# EAGLE board PCB_2D_Proiect (EAGLE 9.7.0)
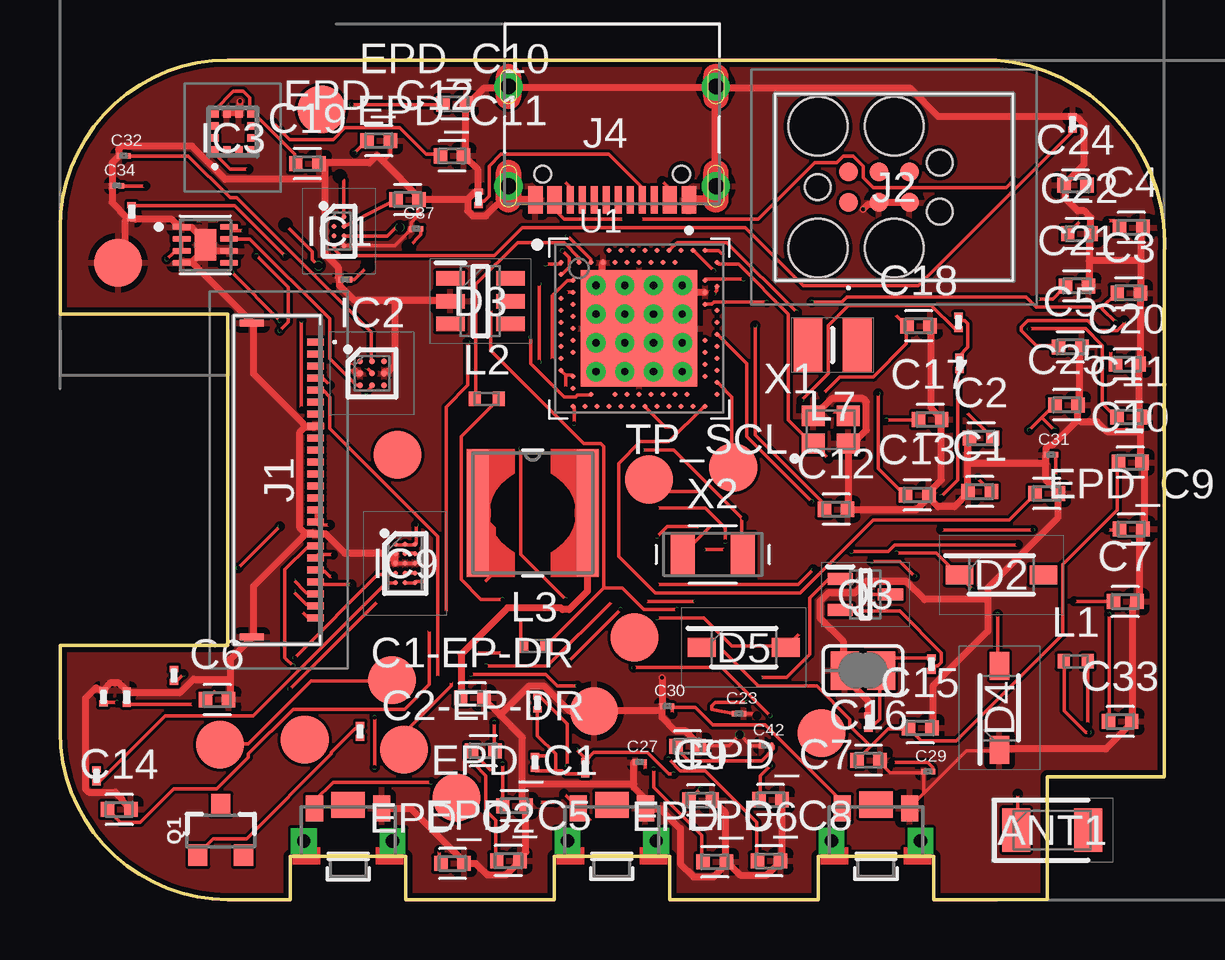
[diagram p0: board, top side]
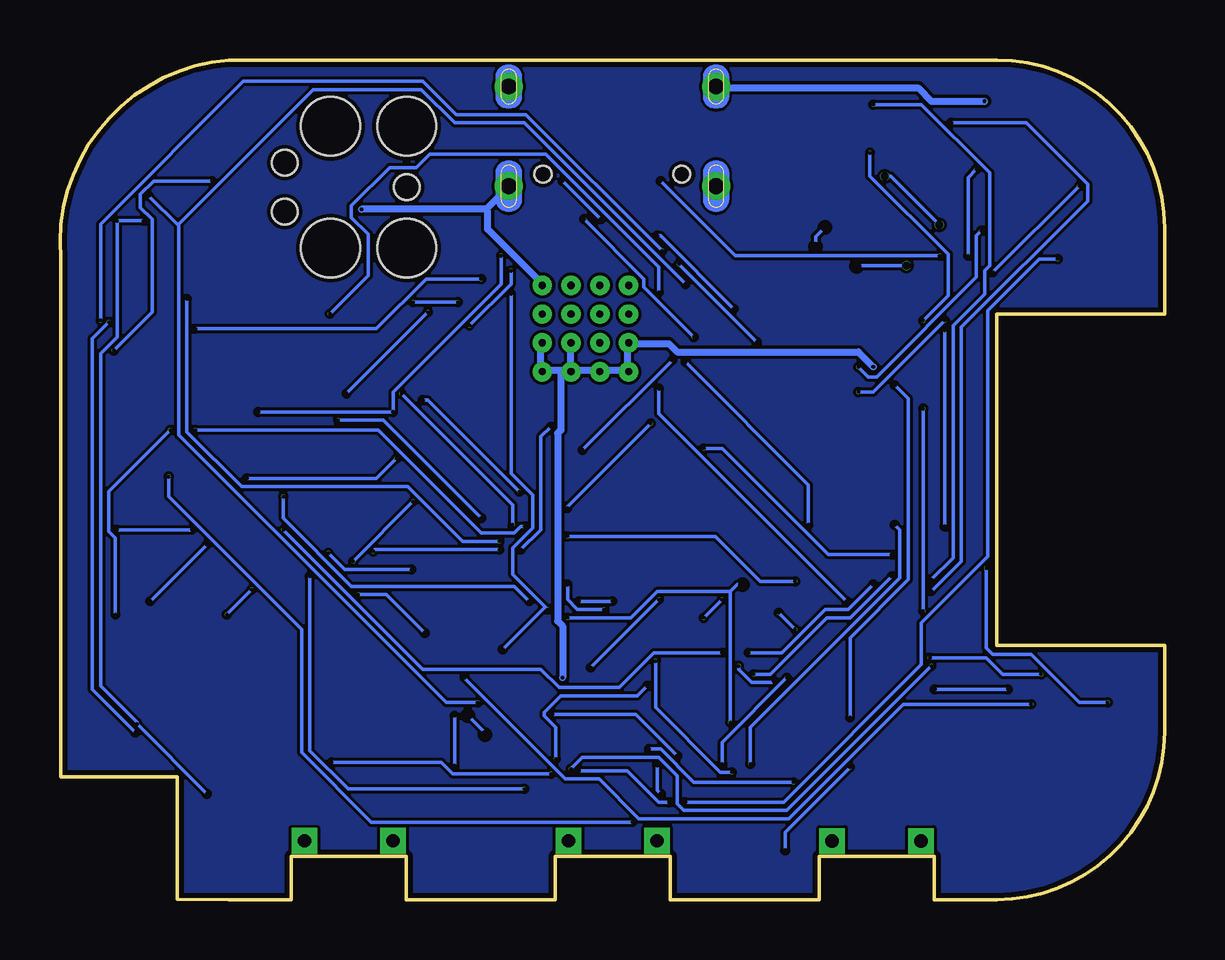
[diagram p1: board, bottom side, seen from below]

Size 46.03 x 35 mm. Coordinates in mm from the lower left corner, seen from the top.
Outline: 39,0 36.4,0 36.4,1.8 31.6,1.8 31.6,0 25.4,0 25.4,1.8 20.6,1.8 20.6,0 14.4,0 14.4,1.8 9.6,1.8 9.6,0 7,0 arc-90 0,7 0,10.6 7,10.6 7,24.4 0,24.4 0,28 arc-90 7,35 39,35 arc-90 46,26.73 46,5.11 41.14,5.11 41.14,0.01 39,0
Copper layers (1*16): Top 0.035mm / dielectric 1.6mm / Bottom 0.035mm
Design rules "jlcpcb-2layers.dru *": minimum track width 0.14998125mm, minimum drill 0.15mm, track to track 5mil, track to pad 5mil, pad to pad 5mil, via to via 5mil, smd to smd 5mil, copper to edge 0.2mm, drill to drill 6mil, minimum pad ring 10mil, minimum via ring 0.003809375mm, stop-mask expansion 4mil, vias tented up to drill 0mil, thermal gap 10mil
Net classes: 1 Power: width 0.3 mm

## Footprints (pad centres in the part's own frame; a part is rotated, then mirrored left to right if it is on the bottom)
2450AT18B100E_ANTC3216X140N = smd 1.15 x 1.8: 1 -1.5,0; 2 1.5,0
CAPC1005X60 = smd 0.56 x 0.629: 1 -0.485,0; 2 0.485,0
GRM011R60J152KE01L_2_CAPC0201X13N = smd 0.22 x 0.23: 1 -0.185,0; 2 0.185,0
ESP32_C6_LIBRARY_5_SOD3716X135N = smd 1.15 x 0.8: 1 -1.75,0; 2 1.75,0
ESP32_C6_LIBRARY_3_SOT95P280X145-6N = smd 1.2 x 0.6: 1 -1.25,0.95; 2 -1.25,0; 3 -1.25,-0.95; 4 1.25,-0.95; 5 1.25,0; 6 1.25,0.95
BQ25180YBGR_BGA8C40P2X4_100X155X50 = smd 0.2 x 0.2: A1 -0.2,0.6; A2 0.2,0.6; B1 -0.2,0.2; B2 0.2,0.2; C1 -0.2,-0.2; C2 0.2,-0.2; D1 -0.2,-0.6; D2 0.2,-0.6
DRV2605YZFR_BGA9C50P3X3_144X144X62 = smd 0.25 x 0.25: A1 -0.5,0.5; A2 0,0.5; A3 0.5,0.5; B1 -0.5,0; B2 0,0; B3 0.5,0; C1 -0.5,-0.5; C2 0,-0.5; C3 0.5,-0.5
BMA423_BMA423 = smd 0.3 x 0.35: 1 -0.75,-0.775; 2 -0.25,-0.775; 3 0.25,-0.775; 4 0.75,-0.775; 7 0.75,0.775; 8 0.25,0.775; 9 -0.25,0.775; 10 -0.75,0.775 | smd 0.35 x 0.3: 5 0.775,-0.25; 6 0.775,0.25; 11 -0.775,0.25; 12 -0.775,-0.25
RT6160AWSC_BGA15C40P3X5_140X230X60 = smd 0.216 x 0.216: A1 -0.4,0.8; A2 0,0.8; A3 0.4,0.8; B1 -0.4,0.4; B2 0,0.4; B3 0.4,0.4; C1 -0.4,0; C2 0,0; C3 0.4,0; D1 -0.4,-0.4; D2 0,-0.4; D3 0.4,-0.4; E1 -0.4,-0.8; E2 0,-0.8; E3 0.4,-0.8
503480-2400_5034802400 = smd 0.3 x 0.7: 1 -5.75,1.525; 2 -5.25,1.525; 3 -4.75,1.525; 4 -4.25,1.525; 5 -3.75,1.525; 6 -3.25,1.525; 7 -2.75,1.525; 8 -2.25,1.525; 9 -1.75,1.525; 10 -1.25,1.525; 11 -0.75,1.525; 12 -0.25,1.525; 13 0.25,1.525; 14 0.75,1.525; 15 1.25,1.525; 16 1.75,1.525; 17 2.25,1.525; 18 2.75,1.525; 19 3.25,1.525; 20 3.75,1.525; 21 4.25,1.525; 22 4.75,1.525; 23 5.25,1.525; 24 5.75,1.525 | smd 0.3 x 1: MP1 -6.54,-1.125; MP2 6.54,-1.125
TC2030-IDC_TC2030IDC = smd 0.783 x 0.783: 1 -0.953,-0.635; 2 -0.953,0.635; 3 0.317,-0.635; 4 0.317,0.635; 5 1.588,-0.635; 6 1.588,0.635 | hole 2.451: -2.223,-2.54; -2.223,2.54; 0.952,-2.54; 0.952,2.54 | hole 1.067: -2.223,0; 2.857,-1.016; 2.857,1.016
KH-TYPE-C-16P_KINGHELM_KH-TYPE-C-16P = smd 0.6 x 1.15: A1_B12 -3.2,4.725; A4_B9 -2.4,4.725; A9_B4 2.4,4.725; A12_B1 3.2,4.725 | smd 0.3 x 1.15: A5 -1.25,4.725; A6 -0.25,4.725; A7 0.25,4.725; A8 1.25,4.725; B5 1.75,4.725; B6 0.75,4.725; B7 -0.75,4.725; B8 -1.75,4.725 | drill 0.65 pad 1.05: SH1 -4.32,0; SH2 4.32,0; SH3 -4.32,4.15; SH4 4.32,4.15 | hole 0.7: -2.89,3.65; 2.89,3.65
NORDIC_NRF_2_RESC0402_L = smd 0.5 x 0.6: 1 -0.5,0; 2 0.5,0
ESP32_C6_LIBRARY_2_IND_4828-WE-TPC_WRE = smd 0.9 x 5.3: 1 -2.286,0; 2 2.286,0
MLP2016SR47MT0S1_INDC2016X100N = smd 1.2 x 2.2: 1 -1.028,0; 2 1.028,0
ESP32_C6_LIBRARY_4_ESP32_C6_LIBRARY_4_ESP32_C6_LIBRARY_4_ESP32_C6_LIBRARY_4_ESP32_WROVER_SPARKFUN-DISCRETESEMI_SOT23-3 = smd 0.8 x 0.9: 1 -0.95,-1; 2 0.95,-1; 3 0,1.1
ESP32_C6_LIBRARY_6_SOT65P210X110-3N = smd 1.05 x 0.5: 1 -1.05,0.65; 2 -1.05,-0.65; 3 1.05,0
CPF0201D7K68C1_0201 = smd 0.35 x 0.25: 1 0,0.275; 2 0,-0.275
ESP32_C6_LIBRARY_7_JUMPER_SJ = smd 1.168 x 1.6: 1 -0.762,0; 2 0.762,0
2025-10-22_07-23-44_LIBRARY_SW_EVP-AKE31A_PAN = smd 0.711 x 1.092: 1 -1.4,-0.972; 2 1.4,-0.972 | drill 0.559 pad 0.914 square: 3 -1.848,0.381; 4 1.848,0.381 | smd 1.397 x 1.092: 5 0,-1.124
HECTOR_WATCH_1_TP20R = smd 2 x 2: TP 0,0
NORDIC_NRF_4_AQFN50P700X700X85_HS-74N = smd 4.85 x 4.85: P$74 0,0 | drill 0.3 pad 0.6: P$75 -1.8,1.8; P$76 -0.6,1.8; P$77 0.6,1.8; P$78 1.8,1.8; P$79 -1.8,0.6; P$80 -0.6,0.6; P$81 0.6,0.6; P$82 1.8,0.6; P$83 -1.8,-0.6; P$84 -0.6,-0.6; P$85 0.6,-0.6; P$86 1.8,-0.6; P$87 -1.8,-1.8; P$88 -0.6,-1.8; P$89 0.6,-1.8; P$90 1.8,-1.8 | smd 0.2 x 0.2: P$A8 -1.25,3.25; P$A10 -0.75,3.25; P$A12 -0.25,3.25; P$A14 0.25,3.25; P$A16 0.75,3.25; P$A18 1.25,3.25; P$A20 1.75,3.25; P$A22 2.25,3.25; P$A23 2.75,3.25; P$AA24 3.25,-2.25; P$AB2 -2.75,-2.5; P$AC5 -2,-2.75; P$AC9 -1,-2.75; P$AC11 -0.5,-2.75; P$AC13 0,-2.75; P$AC15 0.5,-2.75; P$AC17 1,-2.75; P$AC19 1.5,-2.75; P$AC21 2,-2.75; P$AC24 3.25,-2.75; P$AD2 -2.75,-3.25; P$AD4 -2.25,-3.25; P$AD6 -1.75,-3.25; P$AD8 -1.25,-3.25; P$AD10 -0.75,-3.25; P$AD12 -0.25,-3.25; P$AD14 0.25,-3.25; P$AD16 0.75,-3.25; P$AD18 1.25,-3.25; P$AD20 1.75,-3.25; P$AD22 2.25,-3.25; P$AD23 2.75,-3.25; P$B1 -3.25,2.75; P$B3 -2.5,2.75; P$B5 -2,2.75; P$B7 -1.5,2.75; P$B9 -1,2.75; P$B11 -0.5,2.75; P$B13 0,2.75; P$B15 0.5,2.75; P$B17 1,2.75; P$B19 1.5,2.75; P$B24 3.25,2.75; P$C1 -3.25,2.25; P$D2 -2.75,2; P$D23 2.75,2; P$E24 3.25,1.75; P$F2 -2.75,1.5; P$F23 2.75,1.5; P$G1 -3.25,1.25; P$H2 -2.75,1; P$H23 2.75,1; P$J1 -3.25,0.75; P$J24 3.25,0.75; P$K2 -2.75,0.5; P$L1 -3.25,0.25; P$L24 3.25,0.25; P$M2 -2.75,0; P$N1 -3.25,-0.25; P$N24 3.25,-0.25; P$P2 -2.75,-0.5; P$P23 2.75,-0.5; P$R1 -3.25,-0.75; P$R24 3.25,-0.75; P$T2 -2.75,-1; P$T23 2.75,-1; P$U1 -3.25,-1.25; P$U24 3.25,-1.25; P$V23 2.75,-1.5; P$W1 -3.25,-1.75; P$W24 3.25,-1.75; P$Y2 -2.75,-2; P$Y23 2.75,-2
ESP32_C6_LIBRARY_SON50P200X200X80-9N = smd 0.76 x 0.27: 1 -0.985,0.75; 2 -0.985,0.25; 3 -0.985,-0.25; 4 -0.985,-0.75; 5 0.985,-0.75; 6 0.985,-0.25; 7 0.985,0.25; 8 0.985,0.75 | smd 0.9 x 1.3: 9 0,0
NORDIC_NRF_BT-XTAL_2016_N = smd 0.95 x 0.85: 1 -0.725,-0.575; 2 0.725,-0.575; 3 0.725,0.575; 4 -0.725,0.575
XTAL330X1051X90N = smd 1 x 1.8: 1 -1.25,0; 2 1.25,0

## Placement (x,y rotation side)
ANT1  2450AT18B100E_2450AT18B100E  [2450AT18B100E_ANTC3216X140N]  41.34,2.89 0 top
C1  12pF  [CAPC1005X60]  38.32,17.01 0 top
C1-EP-DR  10uF  [CAPC1005X60]  17.18,8.4 0 top
C2  12pF  [CAPC1005X60]  38.38,19.24 0 top
C2-EP-DR  4.7uF/25V  [CAPC1005X60]  17.63,6.2 0 top
C3  1pF  [CAPC1005X60]  44.54,25.29 0 top
C4  1pF  [CAPC1005X60]  44.64,28.02 0 top
C5  100nF  [CAPC1005X60]  42.1,23.03 0 top
C6  4.7µF  [CAPC1005X60]  6.54,8.33 0 top
C7  100nF  [CAPC1005X60]  44.39,12.42 0 top
C8  100nF  [CAPC1005X60]  41.11,16.93 0 top
C9  820pF  [CAPC1005X60]  26.69,4.14 0 top
C10  100pF  [CAPC1005X60]  44.59,18.23 0 top
C11  100pF  [CAPC1005X60]  44.53,20.12 0 top
C12  100nF  [CAPC1005X60]  32.34,16.27 0 top
C13  100nF  [CAPC1005X60]  35.72,16.87 0 top
C14  4.7µF  [CAPC1005X60]  2.47,3.75 0 top
C15  1.0µF  [CAPC1005X60]  35.84,7.15 0 top
C16  47nF  [CAPC1005X60]  33.69,5.81 0 top
C17  12pF  [CAPC1005X60]  36.25,20.01 0 top
C18  12pF  [CAPC1005X60]  35.77,23.91 0 top
C19  100uF  [CAPC1005X60]  10.31,30.68 0 top
C20  4.7µF  [CAPC1005X60]  44.47,22.32 0 top
C21  4.7µF  [CAPC1005X60]  42.37,25.58 0 top
C22  1pF  [CAPC1005X60]  42.48,27.76 0 top
C23  GRM011R60J152KE01L_2_GRM011R60J152KE01L  [GRM011R60J152KE01L_2_CAPC0201X13N]  28.29,7.75 0 top
C24  10uF  [CAPC1005X60]  42.31,29.78 0 top
C25  22uF  [CAPC1005X60]  41.94,20.62 0 top
C27  GRM011R60J152KE01L_2_GRM011R60J152KE01L  [GRM011R60J152KE01L_2_CAPC0201X13N]  24.16,5.73 0 top
C29  GRM011R60J152KE01L_2_GRM011R60J152KE01L  [GRM011R60J152KE01L_2_CAPC0201X13N]  36.17,5.33 0 top
C30  GRM011R60J152KE01L_2_GRM011R60J152KE01L  [GRM011R60J152KE01L_2_CAPC0201X13N]  25.3,8.06 0 top
C31  GRM011R60J152KE01L_2_GRM011R60J152KE01L  [GRM011R60J152KE01L_2_CAPC0201X13N]  41.29,18.53 0 top
C32  GRM011R60J152KE01L_2_GRM011R60J152KE01L  [GRM011R60J152KE01L_2_CAPC0201X13N]  2.66,31 0 top
C33  22uF  [CAPC1005X60]  44.17,7.42 0 top
C34  GRM011R60J152KE01L_2_GRM011R60J152KE01L  [GRM011R60J152KE01L_2_CAPC0201X13N]  2.38,29.76 0 top
C37  GRM011R60J152KE01L_2_GRM011R60J152KE01L  [GRM011R60J152KE01L_2_CAPC0201X13N]  14.84,27.96 0 top
C38  GRM011R60J152KE01L_2_GRM011R60J152KE01L  [GRM011R60J152KE01L_2_CAPC0201X13N]  11.88,25.84 0 top
C39  10uF  [CAPC1005X60]  14.48,29.18 0 top
C42  GRM011R60J152KE01L_2_GRM011R60J152KE01L  [GRM011R60J152KE01L_2_CAPC0201X13N]  29.41,6.42 0 top
C43  4.7uF  [CAPC1005X60]  26.14,6.39 0 top
D2  ESP32_C6_LIBRARY_5_MBR0530  [ESP32_C6_LIBRARY_5_SOD3716X135N]  39.22,13.54 0 top
D3  ESP32_C6_LIBRARY_3_USBLC6-2SC6Y  [ESP32_C6_LIBRARY_3_SOT95P280X145-6N]  17.52,24.94 0 top
D4  ESP32_C6_LIBRARY_5_MBR0530  [ESP32_C6_LIBRARY_5_SOD3716X135N]  39.14,7.99 90 top
D5  ESP32_C6_LIBRARY_5_MBR0530  [ESP32_C6_LIBRARY_5_SOD3716X135N]  28.49,10.51 0 top
EPD_C1  1uF/50V  [CAPC1005X60]  18.93,3.91 0 top
EPD_C2  1uF/50V  [CAPC1005X60]  16.36,1.51 0 top
EPD_C5  0.1uF/50V  [CAPC1005X60]  18.68,1.62 0 top
EPD_C6  1uF/50V  [CAPC1005X60]  27.28,1.57 0 top
EPD_C7  1uF/50V  [CAPC1005X60]  29.6,4.16 0 top
EPD_C8  1uF/50V  [CAPC1005X60]  29.54,1.61 0 top
EPD_C9  1uF/50V  [CAPC1005X60]  44.64,15.44 0 top
EPD_C10  1uF/50V  [CAPC1005X60]  16.44,33.17 0 top
EPD_C11  1uF/50V  [CAPC1005X60]  16.33,31 0 top
EPD_C12  1uF/50V  [CAPC1005X60]  13.28,31.64 0 top
IC1  BQ25180YBGR_BQ25180YBGR  [BQ25180YBGR_BGA8C40P2X4_100X155X50]  11.62,27.86 0 top
IC2  DRV2605YZFR_DRV2605YZFR  [DRV2605YZFR_BGA9C50P3X3_144X144X62]  13,21.94 0 top
IC3  BMA423_BMA423  [BMA423_BMA423]  7.2,32 0 top
IC9  RT6160AWSC_RT6160AWSC  [RT6160AWSC_BGA15C40P3X5_140X230X60]  14.38,14.01 0 top
J1  503480-2400_503480-2400  [503480-2400_5034802400]  9.12,17.49 270 top
J2  TC2030-IDC_TC2030-IDC  [TC2030-IDC_TC2030IDC]  33.8,29.7 0 top
J4  KH-TYPE-C-16P_KH-TYPE-C-16P  [KH-TYPE-C-16P_KINGHELM_KH-TYPE-C-16P]  23.01,33.89 180 top
L1  3.9nH  [NORDIC_NRF_2_RESC0402_L]  42.32,9.93 0 top
L2  10µH  [NORDIC_NRF_2_RESC0402_L]  17.79,20.87 0 top
L3  15nH  [NORDIC_NRF_2_RESC0402_L]  19.77,10.57 0 top
L5  ESP32_C6_LIBRARY_2_744043680IND_4828-WE-TPC_WRE  [ESP32_C6_LIBRARY_2_IND_4828-WE-TPC_WRE]  19.69,16.12 0 top
L7  MLP2016SR47MT0S1_FTC252012SR47MBCA  [MLP2016SR47MT0S1_INDC2016X100N]  32.19,23.12 0 top
Q1  20V/4.2A/52mΩ/1.4W  [ESP32_C6_LIBRARY_4_ESP32_C6_LIBRARY_4_ESP32_C6_LIBRARY_4_ESP32_C6_LIBRARY_4_ESP32_WROVER_SPARKFUN-DISCRETESEMI_SOT23-3]  6.7,2.85 0 top
Q3  ESP32_C6_LIBRARY_6_SI1308EDL-T1-GE3  [ESP32_C6_LIBRARY_6_SOT65P210X110-3N]  33.56,12.72 0 top
R1_EP_DR  CPF0201D7K68C1_CPF0201D7K68C1  [CPF0201D7K68C1_0201]  36.31,9.81 0 top
R1_USB  CPF0201D7K68C1_CPF0201D7K68C1  [CPF0201D7K68C1_0201]  17.44,29.23 0 top
R2  CPF0201D7K68C1_CPF0201D7K68C1  [CPF0201D7K68C1_0201]  1.52,5.16 0 top
R2_EP_DR  CPF0201D7K68C1_CPF0201D7K68C1  [CPF0201D7K68C1_0201]  2.78,8.44 0 top
R2_USB  CPF0201D7K68C1_CPF0201D7K68C1  [CPF0201D7K68C1_0201]  2.99,28.67 0 top
R3  CPF0201D7K68C1_CPF0201D7K68C1  [CPF0201D7K68C1_0201]  1.81,8.45 0 top
R4  CPF0201D7K68C1_CPF0201D7K68C1  [CPF0201D7K68C1_0201]  4.74,9.34 0 top
R5  CPF0201D7K68C1_CPF0201D7K68C1  [CPF0201D7K68C1_0201]  19.79,5.72 0 top
R7  CPF0201D7K68C1_CPF0201D7K68C1  [CPF0201D7K68C1_0201]  21.89,5.5 0 top
R8  CPF0201D7K68C1_CPF0201D7K68C1  [CPF0201D7K68C1_0201]  19.89,8.2 0 top
R9  CPF0201D7K68C1_CPF0201D7K68C1  [CPF0201D7K68C1_0201]  42.19,32.37 0 top
R17  CPF0201D7K68C1_CPF0201D7K68C1  [CPF0201D7K68C1_0201]  37.43,24.07 0 top
R18  CPF0201D7K68C1_CPF0201D7K68C1  [CPF0201D7K68C1_0201]  37.48,22.35 0 top
R_PWR_EPD  CPF0201D7K68C1_CPF0201D7K68C1  [CPF0201D7K68C1_0201]  12.5,7.01 0 top
R_TYPE_SEL  CPF0201D7K68C1_CPF0201D7K68C1  [CPF0201D7K68C1_0201]  33.69,7.4 0 top
SJ1  [ESP32_C6_LIBRARY_7_JUMPER_SJ]  33.46,9.55 0 top
SW_DN  2025-10-22_07-23-44_LIBRARY_EVP-AKE31ASW_EVP-AKE31A_PAN  [2025-10-22_07-23-44_LIBRARY_SW_EVP-AKE31A_PAN]  12,2.83 180 top
SW_ENT  2025-10-22_07-23-44_LIBRARY_EVP-AKE31ASW_EVP-AKE31A_PAN  [2025-10-22_07-23-44_LIBRARY_SW_EVP-AKE31A_PAN]  23,2.83 180 top
SW_UP  2025-10-22_07-23-44_LIBRARY_EVP-AKE31ASW_EVP-AKE31A_PAN  [2025-10-22_07-23-44_LIBRARY_SW_EVP-AKE31A_PAN]  34,2.83 180 top
TP_3.3V  HECTOR_WATCH_1_TPTP20R  [HECTOR_WATCH_1_TP20R]  16.52,4.25 0 top
TP_BAT_GND  HECTOR_WATCH_1_TPTP20R  [HECTOR_WATCH_1_TP20R]  22.25,7.86 0 top
TP_GND  HECTOR_WATCH_1_TPTP20R  [HECTOR_WATCH_1_TP20R]  2.42,26.55 0 top
TP_ON  HECTOR_WATCH_1_TPTP20R  [HECTOR_WATCH_1_TP20R]  31.72,6.95 0 top
TP_OP  HECTOR_WATCH_1_TPTP20R  [HECTOR_WATCH_1_TP20R]  10.9,32.95 0 top
TP_RESET  HECTOR_WATCH_1_TPTP20R  [HECTOR_WATCH_1_TP20R]  14.07,18.54 0 top
TP_SCL  HECTOR_WATCH_1_TPTP20R  [HECTOR_WATCH_1_TP20R]  24.54,17.51 0 top
TP_SDA  HECTOR_WATCH_1_TPTP20R  [HECTOR_WATCH_1_TP20R]  14.34,6.25 0 top
TP_SWDCLK  HECTOR_WATCH_1_TPTP20R  [HECTOR_WATCH_1_TP20R]  28.05,18.01 0 top
TP_SWDIO  HECTOR_WATCH_1_TPTP20R  [HECTOR_WATCH_1_TP20R]  23.93,10.93 0 top
TP_SWO  HECTOR_WATCH_1_TPTP20R  [HECTOR_WATCH_1_TP20R]  6.67,6.45 0 top
TP_VBAT  HECTOR_WATCH_1_TPTP20R  [HECTOR_WATCH_1_TP20R]  10.2,6.67 0 top
TP_VREG  HECTOR_WATCH_1_TPTP20R  [HECTOR_WATCH_1_TP20R]  13.84,9.14 0 top
U1  NORDIC_NRF_4_NRF52840_QF  [NORDIC_NRF_4_AQFN50P700X700X85_HS-74N]  24.13,23.8 0 top
U3  ESP32_C6_LIBRARY_MAX17048G+T10  [ESP32_C6_LIBRARY_SON50P200X200X80-9N]  6.06,27.29 0 top
X1  32MHZ  [NORDIC_NRF_BT-XTAL_2016_N]  32.11,19.58 0 top
X2  FC-135  [XTAL330X1051X90N]  27.2,14.39 0 top

## Library data of the parts
ANT1 = InkTime_v5; ARROW_PART_NUMBER: 2450AT18B100E; ARROW_PRICE-STOCK: https://www.arrow.com/en/products/2450at18b100e/johanson-dielectrics?utm_currency=USD&region=nac; DESCRIPTION: Antennas 2.45GHz ANTENNA; HEIGHT: 1.4mm; MANUFACTURER_NAME: JOHANSON TECHNOLOGY; MANUFACTURER_PART_NUMBER: 2450AT18B100E; MOUSER_PART_NUMBER: 609-2450AT18B100E; MOUSER_PRICE-STOCK: https://www.mouser.co.uk/ProductDetail/Johanson-Technology/2450AT18B100E?qs=yCnrNFeXz%252Bh5MFsFIXGZGA%3D%3D
C1 C1-EP-DR C2 C2-EP-DR C3-C22 C24 C25 C33 C39 C43 EPD_C1 EPD_C2 EPD_C5-EPD_C12 = Tinkercad; CATEGORY: Capacitor
C23 C27 C34 C42 = InkTime_v5; AVAILABILITY: In Stock; CAP: 0.1uF; CHECK_PRICES: https://www.snapeda.com/parts/GRM011R60J152KE01L/Murata/view-part/?ref=eda; DESCRIPTION: SMD Capacitor X5R(EIA) with Capacitance: 1500pF Tol. 10%. Rated Voltage: 6.3Vdc; MF: Murata; MP: GRM011R60J152KE01L; PACKAGE: 0201 Murata; PRICE: None; SNAPEDA_LINK: https://www.snapeda.com/parts/GRM011R60J152KE01L/Murata/view-part/?ref=snap
C29-C32 C37 C38 = InkTime_v5; AVAILABILITY: In Stock; CAP: 1uF; CHECK_PRICES: https://www.snapeda.com/parts/GRM011R60J152KE01L/Murata/view-part/?ref=eda; DESCRIPTION: SMD Capacitor X5R(EIA) with Capacitance: 1500pF Tol. 10%. Rated Voltage: 6.3Vdc; MF: Murata; MP: GRM011R60J152KE01L; PACKAGE: 0201 Murata; PRICE: None; SNAPEDA_LINK: https://www.snapeda.com/parts/GRM011R60J152KE01L/Murata/view-part/?ref=snap
D2 D4 D5 = InkTime_v5; AVAILABILITY: In Stock; CHECK_PRICES: https://www.snapeda.com/parts/MBR0530/Onsemi/view-part/?ref=eda; DESCRIPTION: Diode Schottky 30 V 500mA Surface Mount SOD-123; MF: ON Semiconductor; MP: MBR0530; PACKAGE: SOD-123-2 ON Semiconductor; PRICE: None; PURCHASE-URL: https://www.snapeda.com/api/url_track_click_mouser/?unipart_id=179458&manufacturer=ON Semiconductor&part_name=MBR0530&search_term=None; SHORT_NAME: MBR0530; SNAPEDA_LINK: https://www.snapeda.com/parts/MBR0530/Onsemi/view-part/?ref=snap
D3 = InkTime_v5; AVAILABILITY: In Stock; CHECK_PRICES: https://www.snapeda.com/parts/USBLC6-2SC6Y/STMicroelectronics/view-part/?ref=eda; DESCRIPTION: 17V Clamp 5A (8/20µs) Ipp Tvs Diode Surface Mount SOT-23-6; MF: STMicroelectronics; MP: USBLC6-2SC6Y; PACKAGE: SOT-23-6 STMicroelectronics; PRICE: None; SHORT_NAME: USBLC6-2SC6Y; SNAPEDA_LINK: https://www.snapeda.com/parts/USBLC6-2SC6Y/STMicroelectronics/view-part/?ref=snap
IC1 = InkTime_v5; ARROW_PART_NUMBER: BQ25180YBGR; ARROW_PRICE-STOCK: https://www.arrow.com/en/products/bq25180ybgr/texas-instruments?utm_currency=USD&region=nac; DESCRIPTION: Charger IC Lithium Ion/Polymer, Lithium Iron Phosphate 8-DSBGA (1.6x1.1); HEIGHT: 0.5mm; MANUFACTURER_NAME: Texas Instruments; MANUFACTURER_PART_NUMBER: BQ25180YBGR; MOUSER_PART_NUMBER: 595-BQ25180YBGR; MOUSER_PRICE-STOCK: https://www.mouser.co.uk/ProductDetail/Texas-Instruments/BQ25180YBGR?qs=doiCPypUmgEWjAK%252BJAX6Tw%3D%3D
IC2 = InkTime_v5; ARROW_PART_NUMBER: DRV2605YZFR; ARROW_PRICE-STOCK: https://www.arrow.com/en/products/drv2605yzfr/texas-instruments?region=nac; DESCRIPTION: Haptic Driver for ERM/LRA with Built-In Library and Smart Loop Architecture; HEIGHT: 0.625mm; MANUFACTURER_NAME: Texas Instruments; MANUFACTURER_PART_NUMBER: DRV2605YZFR; SHORT_NAME: DRV2605YZFR
IC3 = InkTime_v5; ARROW_PART_NUMBER: BMA423; ARROW_PRICE-STOCK: https://www.arrow.com/en/products/bma423/bosch; DESCRIPTION: Accelerometers Triaxial low-g 12bit Acceleration Sensor; HEIGHT: 1mm; MANUFACTURER_NAME: BOSCH; MANUFACTURER_PART_NUMBER: BMA423; MOUSER_PART_NUMBER: 262-BMA423; MOUSER_PRICE-STOCK: https://www.mouser.co.uk/ProductDetail/Bosch-Sensortec/BMA423?qs=HXFqYaX1Q2xC%252BSgeGoX3mg%3D%3D
IC9 = InkTime_v5; DESCRIPTION: Buck-Boost Regulator Positive Output Step-Up/Step-Down I2C DC-DC Controller IC 15-WL-CSP (BSC) (1.4x2.3); HEIGHT: 0.6mm; MANUFACTURER_NAME: RICHTEK; MANUFACTURER_PART_NUMBER: RT6160AWSC; MOUSER_PART_NUMBER: 835-RT6160AWSC; MOUSER_PRICE-STOCK: https://www.mouser.co.uk/ProductDetail/Richtek/RT6160AWSC?qs=amGC7iS6iy%2FLd9PSoixZXQ%3D%3D
J1 = InkTime_v5; DESCRIPTION: FFC & FPC Connectors 0.5mm FPC RA SMT Dual Contact 24Ckt; HEIGHT: 1.87mm; MANUFACTURER_NAME: Molex; MANUFACTURER_PART_NUMBER: 503480-2400; MOUSER_PART_NUMBER: 538-503480-2400; MOUSER_PRICE-STOCK: https://www.mouser.co.uk/ProductDetail/Molex/503480-2400?qs=OAhjpuo3Vu7efIoxFh9AOw%3D%3D
J2 = InkTime_v5; DESCRIPTION: CABLE ADAPTER 6 POS; HEIGHT: 19mm; MANUFACTURER_NAME: Tag Connect; MANUFACTURER_PART_NUMBER: TC2030-IDC
J4 = InkTime_v5; AVAILABILITY: Not in stock; CHECK_PRICES: https://www.snapeda.com/parts/KH-TYPE-C-16P/Kinghelm/view-part/?ref=eda; MF: kinghelm; MP: KH-TYPE-C-16P; PACKAGE: None; PRICE: None; SHORT_NAME: KH-TYPE-C-16P; SNAPEDA_LINK: https://www.snapeda.com/parts/KH-TYPE-C-16P/Kinghelm/view-part/?ref=snap
L1-L3 SJ1 TP_3.3V TP_BAT_GND TP_GND TP_ON TP_OP TP_RESET TP_SCL TP_SDA TP_SWDCLK TP_SWDIO TP_SWO TP_VBAT TP_VREG U1 X1 = InkTime_v5
L5 = InkTime_v5; COPYRIGHT: Copyright (C) 2024 Ultra Librarian. All rights reserved.; MANUFACTURER_PART_NUMBER: 744043680; MFR_NAME: Wurth Electronics; VAL: 68uH
L7 = InkTime_v5; DESCRIPTION: SMD / SMT Inductors (Coils), L=0.47?H, L x W x T :; HEIGHT: 1mm; JLCPCB: https://jlcpcb.com/partdetail/6763488-FTC252012SR47MBCA/C5832368; MANUFACTURER_NAME: TDK; MANUFACTURER_PART_NUMBER: FTC252012SR47MBCA; SHORT_NAME: FTC252012SR47MBCA
Q1 = InkTime_v5; PROD_ID: TRAN-14388; SHORT_NAME: DMG2305UX-7
Q3 = InkTime_v5; AVAILABILITY: In Stock; CHECK_PRICES: https://www.snapeda.com/parts/SI1308EDL-T1-GE3/Vishay+Siliconix/view-part/?ref=eda; DESCRIPTION: Si1308EDL-T1-GE3 N-channel MOSFET Transistor, 1.5 A, 30 V, 3-Pin SC-70 | Siliconix / Vishay SI1308EDL-T1-GE3; MF: Vishay Siliconix; MP: SI1308EDL-T1-GE3; PACKAGE: SOT-323 Vishay Semiconductor; PRICE: None; PURCHASE-URL: https://www.snapeda.com/api/url_track_click_mouser/?unipart_id=274603&manufacturer=Vishay Siliconix&part_name=SI1308EDL-T1-GE3&search_term=None; SHORT_NAME: SI1308EDL-T1-GE3; SNAPEDA_LINK: https://www.snapeda.com/parts/SI1308EDL-T1-GE3/Vishay+Siliconix/view-part/?ref=snap
R1_EP_DR = InkTime_v5; VAL: 0.47
R1_USB R2_USB = InkTime_v5; VAL: 5K1
R2-R4 = InkTime_v5; VAL: 0
R2_EP_DR R5 R7-R9 R_PWR_EPD = InkTime_v5; VAL: 10K
R17 R18 = InkTime_v5; VAL: 3K3
R_TYPE_SEL = InkTime_v5; VAL: 2.2
SW_DN SW_ENT SW_UP = InkTime_v5; COPYRIGHT: Copyright (C) 2025 Ultra Librarian. All rights reserved.; DIGI-KEY_PART_NUMBER_1: P123437TR-ND; DIGI-KEY_PART_NUMBER_2: P123437CT-ND; DIGI-KEY_PART_NUMBER_3: P123437DKR-ND; MANUFACTURER_NAME: Panasonic; MANUFACTURER_PART_NUMBER: EVP-AKE31A
U3 = InkTime_v5; AVAILABILITY: In Stock; CHECK_PRICES: https://www.snapeda.com/parts/MAX17048G+T10/Analog+Devices/view-part/?ref=eda; DESCRIPTION: 3µA 1-Cell/2-Cell Fuel Gauge with ModelGauge; MF: Analog Devices; MP: MAX17048G+T10; PACKAGE: TDFN-8 Maxim; PRICE: None; PURCHASE-URL: https://www.snapeda.com/api/url_track_click_mouser/?unipart_id=329239&manufacturer=Analog Devices&part_name=MAX17048G+T10&search_term=None; SHORTNAME: U3; SHORT_NAME: MAX17048G+T10; SNAPEDA_LINK: https://www.snapeda.com/parts/MAX17048G+T10/Analog+Devices/view-part/?ref=snap
X2 = Frequency-Source; CATEGORY: Crystals; DATASHEET: https://download.epsondevice.com/td/pdf/app/FC-135_en.pdf; DESCRIPTION: 32.768 kHz ±20 ppm Crystal 12.5 pF 70 kOhms 2-SMD No Lead; FREQUENCY: 32.768 kHz; FREQUENCY_STABILITY: NA; LOAD_CAPACITANCE: 12.5 pF; MANUFACTURER: EPSON; MPN: FC-135 32.7680KA-A5; OPERATING_TEMPERATURE: -40°C ~ 85°C; PACKAGE_SIZE: 2-SMD No Lead; PACKAGE_TYPE: Surface Mount; PART_STATUS: Active; ROHS: Compliant; SERIES: FC-135; SUBCATEGORY: Oscillators; TOLERANCE: ±20 ppm; TYPE: Resonators

## Nets
3V3/1.7D [Power]: Q1.2
3V3/2.4A [Power]: TP_3.3V.TP
ALERT/1.6C: U3.5
ALERT/2.5C: U1.P$J24
D+/1.5D: D3.4
D+/2.7D: U1.P$AD6
D-/1.5D: D3.6
D-/2.7D: U1.P$AD4
DN: D3.1
DP: D3.3
EPD_3V3 [Power]: C1-EP-DR.1 L5.2
EPD_BUSY/1.5D: J1.9
EPD_BUSY/2.2D: U1.P$AD12
EPD_CS/1.4C: J1.12
EPD_CS/2.2D: U1.P$K2
EPD_DC/1.5D: J1.11
EPD_DC/2.2D: U1.P$AD10
EPD_RST/1.5D: J1.10
EPD_RST/2.2D: U1.P$AC11
GDR: Q3.1 R2_EP_DR.2
GND [Power]: C1-EP-DR.2 C1.1 C2.1 C3.2 C4.2 C5.2 C6.2 C7.2 C8.2 C9.2 C10.2 C11.2 C12.2 C13.2 C14.2 C15.2 C16.2 C17.2 C18.2 C19.2 C20.2 C21.2 C22.2 C23.2 C24.1 C25.2 C27.1 C29.1 C30.1 C31.1 C32.1 C33.2 C34.1 C37.1 C38.1 C39.2 C42.1 C43.2 D3.2 D4.1 EPD_C1.2 EPD_C2.2 EPD_C5.2 EPD_C6.2 EPD_C7.2 EPD_C8.2 EPD_C9.2 EPD_C10.2 EPD_C11.2 EPD_C12.2 IC1.D2 IC2.B1 IC2.B3 IC3.8 IC3.9 IC9.B1 IC9.C1 IC9.C2 IC9.C3 J1.8 J1.17 J1.MP1 J1.MP2 J2.3 J2.5 J4.A1_B12 J4.A12_B1 J4.SH1 J4.SH2 J4.SH3 J4.SH4 R1_USB.1 R2_EP_DR.1 R2_USB.2 R3.1 R9.1 R_TYPE_SEL.1 SJ1.1 SW_DN.1 SW_ENT.1 SW_UP.1 TP_BAT_GND.TP TP_GND.TP U1.P$74 U1.P$75 U1.P$76 U1.P$77 U1.P$78 U1.P$79 U1.P$80 U1.P$81 U1.P$82 U1.P$83 U1.P$84 U1.P$85 U1.P$86 U1.P$87 U1.P$88 U1.P$89 U1.P$90 U1.P$B7 U1.P$F23 U3.1 U3.4 U3.6 U3.9 X1.2 X1.4
HAPTIC_EN/1.4C: IC2.A1
HAPTIC_EN/2.6A: U1.P$U1
IMU_INT1: IC3.5
IMU_INT2: IC3.6
LX1: L7.1
LX2: L7.2
MOSI/1.5B: J1.14
MOSI/2.2D: U1.P$B13
N$1: IC9.D1 R4.2
N$2: IC1.D1 R9.2
N$3: R4.1
N$4: IC9.D2 IC9.D3
N$5: IC9.E1 R2.2
N$6: C25.1 C33.1 IC9.E2 IC9.E3
N$7: R17.1 R18.1
N$8: IC9.B2 IC9.B3
N$9: C23.1 C24.2 IC9.A1 IC9.A2 IC9.A3
N$10: R17.2 TP_SCL.TP
N$11: R18.2 TP_SDA.TP
N$12: IC3.3
N$13: IC3.2
N$14: IC3.1 R3.2
N$15: IC3.12
N$16: J2.1
N$17: C19.1 IC3.7 IC3.10
N$18: J2.2
N$19: J2.6
N$20: J2.4
N$21: C8.1 U1.P$AD23
N$23: U1.P$AC24
N$24: C9.1 U1.P$N24
N$25: C2.2 U1.P$A23 X1.3
N$26: C3.1 L1.1 U1.P$H23
N$27: ANT1.1 C4.1 C22.1 L1.2
N$28: C2-EP-DR.2 D5.2 L5.1 Q3.3
N$29: C1.2 U1.P$B24 X1.1
N$30: C11.1 U1.P$D23
N$31: U1.P$AD22
N$32: C20.1 U1.P$AC5
N$33: C6.1 U1.P$W1 U1.P$Y2
N$34: C14.1 U1.P$B1
N$35: U1.P$T2
N$36: C12.1 U1.P$A22
N$37: U1.P$P2
N$38: U1.P$N1
N$39: C7.1 U1.P$AD14
N$40: U1.P$AC13
N$41: U1.P$M2
N$42: U1.P$L1
N$43: L2.2 L3.1
N$44: C10.1 C15.1 C16.1 L3.2 U1.P$B5 U1.P$E24
N$45: C13.1 U1.P$A18
N$46: C2-EP-DR.1 D2.1 D4.2
N$47: C18.1 U1.P$F2 X2.1
N$48: C21.1 U1.P$AD2
N$49: C17.1 U1.P$D2 X2.2
N$50: C5.1 U1.P$C1
N$51: R2.1
N$52: R1_EP_DR.1 R_TYPE_SEL.2 SJ1.2
N$53: R_PWR_EPD.2
N$54: J1.2
N$55: Q1.3
N$56: J1.3
N$57: EPD_C2.1 J1.4
N$58: EPD_C1.1 J1.5
N$59: J4.A4_B9 J4.A9_B4
N$60: C27.2 U3.2 U3.3
N$61: J4.B7
N$62: L2.1 U1.P$B3
N$63: J4.B6
N$64: D3.5
N$65: J4.B5 R2_USB.1
N$66: J4.A5 R1_USB.2
N$67: J4.A6
N$68: EPD_C5.1 J1.15 J1.16
N$69: J4.A7
N$70: EPD_C6.1 J1.18
N$71: EPD_C7.1 J1.19
N$72: EPD_C8.1 J1.20
N$73: EPD_C9.1 J1.21
N$74: EPD_C10.1 J1.22
N$75: EPD_C11.1 J1.23
N$76: EPD_C12.1 J1.24
N$78: C34.2 IC2.C2
N$79: IC2.C3
N$81: C32.2 IC2.A2
N$82: IC2.A3
N$84: R5.2 R7.2 R8.2
OUT+: TP_OP.TP
OUT-: TP_ON.TP
P0.04: U1.P$J1
P0.09: U1.P$L24
P0.13/1.5D: C30.2 R5.1 SW_UP.2
P0.13/2.6C: U1.P$AD8
P0.14/1.5D: C31.2 R8.1 SW_ENT.2
P0.14/2.7C: U1.P$AC9
P0.19: U1.P$AC15
P0.20: U1.P$AD16
P0.21: U1.P$AC17
P0.22: U1.P$AD18
P0.23: U1.P$AC19
P0.24: U1.P$AD20
P0.25: U1.P$AC21
P0.26: U1.P$G1
P0.27: U1.P$H2
P0.28: U1.P$B11
P0.29: U1.P$A10
P0.30: U1.P$B9
P0.31: U1.P$A8
P1.01/1.6C: Q1.1 R_PWR_EPD.1
P1.01/2.4B: U1.P$Y23
P1.02/1.6C: C29.2 R7.1 SW_DN.2
P1.02/2.8C: U1.P$W24
P1.03: U1.P$V23
P1.04: U1.P$U24
P1.05: U1.P$T23
P1.06: U1.P$R24
P1.07: U1.P$P23
P1.09: U1.P$R1
P1.10: U1.P$A20
P1.11: U1.P$B19
P1.12: U1.P$B17
P1.13: U1.P$A16
P1.14: U1.P$B15
P1.15: U1.P$A14
PMIC_INT: IC1.A1
PREVGH: D5.1
PREVGL: D2.2
RESE: Q3.2 R1_EP_DR.2
RESET: TP_RESET.TP
SCK/1.5B: J1.13
SCK/2.2D: U1.P$A12
SCL/1.4C: IC2.C1 U3.7
SCL/2.4C: IC1.B1
SDA/1.4C: IC2.B2 U3.8
SDA/2.4C: IC1.C1
SWDCLK: TP_SWDCLK.TP U1.P$AA24
SWDIO: TP_SWDIO.TP
SWO: TP_SWO.TP TP_VREG.TP
VBAT/1.2A [Power]: TP_VBAT.TP
VBAT/2.5C [Power]: C37.2 IC1.C2
VBUS/1.5D [Power]: C42.2 C43.1
VBUS/2.6D [Power]: C38.2 IC1.A2
VREG [Power]: C39.1 IC1.B2

## Tracks (layer width: path | path; a pad name or v marks a point on that pad's centre or on a via)
EPD_3V3
  Top 0.3: C1-EP-DR.1 16.71,8.42 16.71,10.22 18.65,12.16 20.86,12.16 20.93,12.09 21.21,12.09 21.97,12.85 L5.2
GDR  (via drill 0.15)
  Top 0.15: v5.56,8.14 2.79,8.14 R2_EP_DR.2 | v29.17,9.25 30.28,9.25 31.25,10.22 31.25,12.58 32.01,13.34 32.5,13.34 Q3.1
  Bottom 0.15: v5.56,8.14 10.89,8.14 15.67,3.37 21.9,3.37 23.56,5.03 24.97,5.03 29.17,9.23 v29.17,9.25
GND  (via drill 0.15, 0.35)
  Top 0.15: 35.4,3.85 35.97,4.42 | 34.23,5.65 34.59,5.29 35.62,5.29 35.94,5.29 C29.1 35.99,4.43 35.97,4.42 | 14.91,29.12 14.91,28.5 14.63,28.22 | IC9.C3 IC9.C2 | C23.2 28.96,7.75 v29.03,7.67 | EPD_C12.2 13.77,31.08 13.46,30.78 | 26.82,6.41 27.86,6.41 v28.32,6.88 28.78,6.41 C42.1 | 35.97,4.42 37.76,6.21 39.07,6.21
  Top 0.152: 14.63,28.22 14.63,27.95 13.94,27.26 IC1.D2 | IC9.C1 IC9.C2
  Top 0.3: X1.4 31.46,20.19 32.15,20.88 33.47,20.88 33.6,20.75 33.6,19.57 32.98,18.95 X1.2 32.84,18.95 32.84,16.31 C12.2 32.98,16.25 35.68,16.25 36.1,16.66 C13.2 | C13.2 36.23,16.8 36.23,16.73 36.58,16.38 37.27,16.38 37.83,16.94 C1.1 37.83,17.15 37.83,18.18 | C13.2 36.23,17.01 36.72,17.49 36.72,19.98 C17.2 36.65,20.12 36.3,20.47 36.3,23.86 C18.2 | 37.83,18.18 37.83,19.22 C2.1 | R_TYPE_SEL.1 33.67,7.73 33.67,8.28 32.7,9.25 32.7,9.53 SJ1.1 32.63,9.67 32.63,10.78 31.66,11.74 31.66,12.44 32.01,12.78 33.12,12.78 33.6,13.27 35.27,13.27 36.03,12.51 38.66,12.51 | C5.2 42.54,23.03 42.47,22.96 42.47,20.68 C25.2 42.4,20.47 42.4,19.98 | 41.08,18.18 41.08,17.49 41.64,16.94 C8.2 41.57,16.8 41.57,15.9 38.66,12.99 38.66,12.51 | 41.08,18.18 41.08,18.53 | 41.08,18.53 C31.1 | 38.66,12.51 38.66,11.19 36.37,8.91 36.37,7.17 C15.2 | 42.4,19.98 41.36,18.95 41.22,18.95 41.08,18.81 41.08,18.53 | 41.08,18.18 37.83,18.18 | 42.88,26.63 42.88,27.67 42.95,27.74 C22.2 42.95,27.88 42.95,28.43 42.67,28.71 42.4,28.71 41.91,29.19 41.91,29.68 C24.1 41.84,29.82 42.67,30.65 42.67,32.31 42.4,32.59 42.26,32.59 R9.1 42.05,32.66 36.58,32.66 35.4,33.83 27.44,33.83 J4.SH1 | 42.88,26.63 42.88,25.59 C21.2 | 45.03,26.63 45.03,27.95 45.1,28.02 C4.2 | 45.03,26.63 45.03,25.32 C3.2 45.03,25.18 45.03,22.41 C20.2 44.96,22.27 44.96,20.19 C11.2 45.03,20.05 45.03,19.5 | 45.03,26.63 42.88,26.63 | 35.4,3.85 SW_UP.1 | 34.23,5.65 34.23,5.79 C16.2 | 39.07,6.21 D4.1 39.28,6.27 43.57,6.27 44.61,7.31 C33.2 44.68,7.45 44.68,12.23 44.82,12.37 C7.2 44.96,12.51 44.96,15.28 45.03,15.35 EPD_C9.2 45.17,15.48 45.17,18.12 C10.2 45.03,18.25 45.03,19.5
  Top 0.3: 45.03,19.5 43.64,19.5 43.23,19.92 42.54,19.92 42.4,19.98 | 7.08,9.18 7.08,10.01 7.98,10.91 J1.MP2 8.05,11.05 8.05,13.06 10.13,15.14 10.2,15.28 | 7.08,9.18 7.08,8.35 C6.2 | C14.2 2.93,3.78 2.58,4.13 2.58,4.2 2.31,4.47 1.2,4.47 1.06,4.61 1.06,8.39 1.5,8.83 R3.1 2.12,9.04 2.43,9.04 R2_EP_DR.1 2.86,8.63 5.01,8.63 5.56,9.18 7.08,9.18 | 13.94,14.17 13.94,14.38 IC9.B1 | 13.94,14.17 13.94,14.03 IC9.C1 | 13.94,14.17 13.38,14.45 11.86,14.45 11.07,15.24 J1.17 10.55,15.28 10.2,15.28 | 10.2,19.71 10.61,19.71 J1.8 | 10.2,19.71 9.99,19.5 9.99,15.48 10.2,15.28 | 2.44,30.99 2.17,30.72 2.17,29.82 C34.1 2.17,29.61 2.17,29.06 2.79,28.43 | 2.44,30.99 C32.1 | 2.79,28.43 2.93,28.43 R2_USB.2 3.14,28.36 4.66,28.36 4.94,28.09 U3.1 5.08,28.02 5.49,28.02 6.11,27.39 U3.9 | 2.79,28.43 2.72,28.29 2.72,26.84 2.44,26.56 TP_GND.TP | 5.49,26.56 5.08,26.56 U3.4 | 5.49,26.56 6.04,27.12 6.04,27.26 U3.9 | U3.6 7.01,27.05 6.18,27.05 U3.9 | 5.49,26.56 7.98,24.07 J1.MP1 8.05,23.93 8.05,21.92 10.13,19.85 10.2,19.71 | 25.09,7.87 25.09,7.59 25.64,7.04 26.06,7.04 26.68,6.41 C43.2 26.82,6.41 | 25.09,7.87 25.09,8.01 C30.1 25.09,8.14 v25.09,9.25 | 25.09,7.87 22.32,7.87 TP_BAT_GND.TP 22.11,7.87 21.21,7.87 20.17,8.91 19.55,8.91 18.34,7.69 | EPD_C7.2 30.07,4.13 30.07,1.63 EPD_C8.2 29.93,1.5 29.45,1.01 28.34,1.01 27.86,1.5 EPD_C6.2 | EPD_C6.2 27.72,1.63 27.72,3.64 27.23,4.13 C9.2 | 23.91,4.82 23.91,4.68 24.39,4.2 24.39,3.85 SW_ENT.1 24.53,3.78 25.02,3.78 25.85,2.95 25.85,1.5 26.4,0.94 27.23,0.94 27.72,1.43 EPD_C6.2 | 23.91,4.82 23.91,5.72 C27.1 | 18.34,7.69 19.27,6.76 19.27,4.82 | 18.34,7.69 17.68,8.35 C1-EP-DR.2
  Top 0.3: 19.27,4.82 19.27,4.2 19.41,4.06 EPD_C1.2 19.41,3.85 19.41,1.98 19.2,1.77 EPD_C5.2 19.13,1.57 18.58,1.01 17.82,1.01 17.33,1.5 EPD_C2.2 16.78,1.63 14.63,3.78 13.45,3.78 SW_DN.1 | 19.27,4.82 23.91,4.82 | IC3.9 7.01,32.79 7.43,32.79 IC3.8 7.5,32.93 v7.5,33.28 | 11.65,25.8 11.65,25.59 12.28,24.97 13.94,24.97 | 13.94,24.97 16.22,24.97 D3.2 | 11.65,25.8 C38.1 | 13.94,24.97 13.94,22.27 13.66,21.99 13.52,21.99 IC2.B3 | J4.A12_B1 19.75,29.19 19.2,29.19 18.72,29.68 J4.SH4 18.72,29.47 17.75,28.5 17.19,28.5 16.99,28.71 16.99,29.19 | 17.4,29.54 17.4,30.44 16.85,30.99 EPD_C11.2 16.92,31.13 16.92,33.14 EPD_C10.2 17.05,33.21 17.68,33.83 18.65,33.83 J4.SH2 18.79,33.83 27.16,33.83 J4.SH1 | 17.4,29.54 R1_USB.1 | 16.99,29.19 17.26,29.47 17.4,29.54 | 14.63,27.95 C37.1 | 14.91,29.12 C39.2 | C39.2 14.98,29.26 13.46,30.78 13.21,31.03 12.9,30.72 10.82,30.72 C19.2 11.03,30.58 11.03,30.02 | 16.99,29.19 15.12,29.19 C39.2 | 11.03,30.02 11.03,26.91 11.58,26.36 11.58,25.94 11.65,25.8 | J2.5 35.33,29.06 34.16,29.06 J2.3 34.02,28.99 33.67,28.99 v33.47,28.78 | J4.A1_B12 26.26,29.19 26.82,29.19 27.3,29.68 J4.SH3 27.3,29.89 27.3,33.83 J4.SH1 | 25.99,25.59 26.26,25.32 26.82,25.32 U1.P$F23 | U1.P$B7 22.59,26.49 22.59,25.87 22.39,25.66 U1.P$74 | U1.P$84 23.56,23.24 24.05,23.72 U1.P$74 | U1.P$85 24.67,23.24 24.19,23.72 U1.P$74 | U1.P$79 22.39,24.42 22.94,24.97 U1.P$74 | U1.P$80 23.56,24.42 U1.P$74 | U1.P$81 24.74,24.42 U1.P$74 | U1.P$75 22.39,25.59 U1.P$74 | U1.P$76 23.49,25.59 23.01,25.11 U1.P$74 | U1.P$77 24.74,25.59 25.29,25.04 U1.P$74 | U1.P$82 25.92,24.42 25.43,24.9 U1.P$74 | 25.99,25.59 U1.P$78 | 25.99,25.59 U1.P$74
  Top 0.3: v12.14,22.2 12.42,21.92 12.48,21.92 IC2.B1 | 11.03,30.02 6.88,30.02 5.49,31.41 2.58,31.41 2.44,31.27 2.44,30.99
  Bottom 0.15: v29.03,7.67 28.32,6.96 v28.32,6.88
  Bottom 0.3: v7.5,33.28 9.71,33.28 10.27,33.83 18.65,33.83 J4.SH2 | 28.27,28.78 v33.47,28.78 | 28.27,28.78 27.37,29.68 J4.SH3 | v12.14,22.2 12.76,22.82 20.31,22.82 20.66,23.17 22.32,23.17 U1.P$83 22.39,23.03 22.39,22.06 U1.P$87 22.52,22.06 23.49,22.06 U1.P$88 23.63,22.06 24.67,22.06 U1.P$89 | 25.16,22.06 24.88,22.06 U1.P$89 | 25.16,22.06 25.92,22.06 U1.P$90 25.99,22.2 25.99,23.17 U1.P$86 | U1.P$85 24.74,23.17 24.74,22.2 U1.P$89 | 28.27,28.78 28.2,28.64 28.2,27.95 25.92,25.66 U1.P$78 | v25.09,9.25 25.09,11.4 25.29,11.61 25.29,19.43 25.16,19.57 25.16,22.06
  pour Top: 31.56,1.86 31.58,1.88 36.42,1.88 36.44,1.86 36.46,1.84 36.48,1.82 36.48,0.08 39,0.08 41.06,0.08 41.06,5.12 41.07,5.15 41.1,5.17 41.12,5.18 45.92,5.18 45.92,26.72 45.92,26.72 45.92,26.73 45.92,26.75 45.92,26.75 45.95,27.59 45.87,28.43 45.71,29.27 45.45,30.08 45.1,30.85 44.67,31.59 44.15,32.27 43.57,32.88 42.92,33.43 42.21,33.9 41.45,34.29 40.66,34.59 39.84,34.81 38.99,34.92 7,34.92 6.22,34.88 5.46,34.75 4.71,34.54 4,34.24 3.32,33.86 2.68,33.41 2.1,32.9 1.59,32.32 1.14,31.68 0.76,31 0.46,30.29 0.25,29.54 0.12,28.78 0.08,28 0.08,24.48 7.02,24.48 7.04,24.46 7.06,24.44 7.08,24.42 7.08,10.58 7.06,10.56 7.04,10.54 7.02,10.52 0.08,10.52 0.08,7 0.12,6.22 0.25,5.46 0.46,4.71 0.76,4 1.14,3.32 1.59,2.68 2.1,2.1 2.68,1.59 3.32,1.14 4,0.76 4.71,0.46 5.46,0.25 6.22,0.12 7,0.08 9.52,0.08 9.52,1.82 9.54,1.84 9.56,1.86 9.58,1.88 14.42,1.88 14.44,1.86 14.46,1.84 14.48,1.82 14.48,0.08 20.52,0.08 20.52,1.82 20.54,1.84 20.56,1.86 20.58,1.88 25.42,1.88 25.44,1.86 25.46,1.84 25.48,1.82 25.48,0.08 31.52,0.08 31.52,1.82 31.54,1.84
N$1  (via drill 0.15)
  Top 0.15: v9.78,10.08 13.25,13.54 13.94,13.54 IC9.D1 | v5.14,9.39 4.8,9.04 R4.2
  Bottom 0.15: v9.78,10.08 7.43,10.08 6.74,9.39 v5.14,9.39
N$2
  Top 0.15: IC1.D1 11.45,27.26 11.45,27.1 11.7,26.84 18.09,26.84 19.27,28.02 28.55,28.02 30.97,25.59 35.75,25.59 42.19,32.03 R9.2
N$4
  Top 0.15: IC9.D2 14.42,13.61 IC9.D3
N$5
  Top 0.15: IC9.E1 13.94,13.2 13.59,13.2 8.05,7.66 4.38,7.66 1.61,4.89 1.54,4.89 R2.2
N$6  (via drill 0.15)
  Top 0.15: IC9.E2 14.42,13.2 14.77,13.2 IC9.E3 14.84,13.27 v15.39,13.27 | v24.88,15.14 25.29,15.55 v26.68,15.55 | 40.91,20.09 41.43,20.61 C25.1 | 40.91,20.09 v40.39,19.57 | v43.71,11.88 43.71,7.45 C33.1 | 40.91,20.09 v41.43,19.57
  Bottom 0.15: v15.39,13.27 16.85,13.27 18.72,15.14 v24.88,15.14 | v26.68,15.55 26.82,15.55 27.09,15.28 28.48,15.28 32.77,19.57 v40.39,19.57 | v43.71,11.88 43.71,15.07 43.99,15.35 43.99,17.01 v41.43,19.57
N$7
  Top 0.15: R17.1 37.48,24.28 37.62,24.14 37.69,24.14 37.83,24 37.83,23.03 37.48,22.69 R18.1
N$8
  Top 0.15: IC9.B2 14.42,14.45 14.77,14.45 IC9.B3
N$9  (via drill 0.15)
  Top 0.15: IC9.A1 14.01,14.79 14.35,14.79 IC9.A2 14.42,14.79 14.77,14.79 IC9.A3 14.84,14.86 v14.84,15.62 | v28.62,8.21 27.3,8.21 27.16,8.07 27.16,7.92 C23.1 | v42.33,29.33 42.74,29.75 C24.2 | v19.96,25.66 v19.96,22.41
  Bottom 0.15: v28.62,8.21 29.93,8.21 41.08,19.36 41.08,28.09 | v42.33,29.33 41.08,28.09 | v14.84,15.62 14.84,17.28 v19.96,22.41 | v19.96,25.66 26.68,32.38 29.59,32.38 30.97,33.76 35.47,33.76 41.08,28.16 41.08,28.09
N$10  (via drill 0.15)
  Top 0.15: v30.9,20.82 32.01,21.92 32.01,23.93 32.84,24.76 36.3,24.76 37.27,23.79 37.41,23.79 R17.2 | v26.89,17.01 25.09,17.01 24.6,17.49 TP_SCL.TP
  Bottom 0.15: v30.9,20.82 30.7,20.82 v26.89,17.01
N$11  (via drill 0.15)
  Top 0.15: v36.72,16.8 37.41,17.49 37.41,22.06 R18.2 | v24.39,12.44 v26.47,12.44 | v23.01,12.44 20.31,9.74 v17.75,9.74 | v16.29,9.11 16.29,8.91 14.35,6.97 14.35,6.27 TP_SDA.TP
  Bottom 0.15: v36.72,16.8 36.72,15.9 33.88,13.06 27.09,13.06 v26.47,12.44 | v23.01,12.44 v24.39,12.44 | v17.75,9.74 17.75,9.6 17.19,9.04 16.36,9.04 v16.29,9.11
N$14  (via drill 0.15)
  Top 0.15: v2.37,8.21 1.82,8.21 R3.2 | v9.16,15.55 v7.43,13.82 | v9.16,23.72 9.51,24.07 9.51,25.52 v8.19,26.84 | v7.85,30.44 7.08,30.44 6.46,31.06 6.46,31.2 IC3.1
  Bottom 0.15: v2.37,8.21 3.55,8.21 5.56,10.22 7.15,10.22 7.43,10.5 v7.43,13.82 | v9.16,23.72 v9.16,15.55 | v8.19,26.84 8.19,30.09 v7.85,30.44
N$17
  Top 0.15: IC3.10 6.46,32.79 6.46,32.93 7.22,33.69 7.64,33.69 7.91,33.42 7.91,32.79 IC3.7 7.98,32.86 9.78,31.06 9.78,30.72 C19.1
N$21
  Top 0.15: U1.P$AD23 26.82,20.54 25.36,19.08 24.19,19.08 23.29,18.18 23.29,14.31 24.81,12.78 30.83,12.78 33.88,15.83 39.56,15.83 40.6,16.87 C8.1
N$24  (via drill 0.15)
  Top 0.15: v31.32,16.59 28.62,19.29 28.62,22.34 27.44,23.52 U1.P$N24 | v33.81,14.1 34.99,14.1 v35.61,13.48 | v26.68,4.61 26.26,4.2 C9.1
  Bottom 0.15: v33.81,14.1 v31.32,16.59 | v35.61,13.48 35.61,6.21 34.02,4.61 v26.68,4.61
N$25  (via drill 0.15)
  Top 0.15: v27.65,26.84 27.44,27.05 U1.P$A23 | v32.15,20.33 32.63,20.33 32.77,20.19 X1.3 | v37.76,20.33 38.8,19.29 C2.2
  Bottom 0.15: v27.65,26.84 27.65,25.66 32.15,21.16 v32.15,20.33 v37.76,20.33
N$26  (via drill 0.15)
  Top 0.15: v29.45,24.9 27.23,24.9 27.16,24.83 26.89,24.83 U1.P$H23 | v31.32,24.9 32.57,24.9 32.77,25.11 40.25,25.11 40.67,24.69 43.44,24.69 | 43.44,24.69 43.99,25.25 C3.1 | v42.88,6.97 42.74,6.97 41.84,7.87 41.84,9.88 L1.1 | v43.99,24.07 43.44,24.62 43.44,24.69
  Bottom 0.15: v31.32,24.9 v29.45,24.9 | v42.88,6.97 44.68,8.77 44.68,23.38 v43.99,24.07
N$27  (via drill 0.15)
  Top 0.15: v42.54,28.29 42.05,27.81 C22.1 | v43.64,28.29 43.92,28.29 44.13,28.09 C4.1 | v42.81,7.31 42.81,9.88 L1.2 | v39.9,4.4 39.9,2.95 ANT1.1
  Bottom 0.15: v42.54,28.29 v43.64,28.29 43.64,23.45 44.34,22.75 44.34,8.91 42.81,7.38 v42.81,7.31 v39.9,4.4
N$28  (via drill 0.15, 0.35)
  Top 0.15: v33.6,12.71 34.57,12.71 Q3.3 | v30.83,11.12 30.28,10.57 D5.2 30.21,10.57 27.99,10.57 26.82,11.74 v24.88,11.74 | v18.09,7.38 18.09,6.21 C2-EP-DR.2 | L5.1 17.47,16.11 18.09,15.48 18.09,13.64 v17.59,13.13
  Bottom 0.15: v33.6,12.71 32.43,12.71 v30.83,11.12 | 18.09,12.85 v18.09,7.38 | v24.88,11.74 22.25,11.74 21.14,12.85 18.09,12.85 | v17.59,13.13 17.81,13.13 18.09,12.85
N$29  (via drill 0.15)
  Top 0.15: U1.P$B24 27.44,26.49 28.27,26.49 30.35,24.42 30.35,19.98 31.39,18.95 X1.1 31.46,18.95 v32.01,18.39 | v38.24,17.56 38.8,17.01 C1.2
  Bottom 0.15: v38.24,17.56 32.84,17.56 v32.01,18.39
N$30  (via drill 0.15)
  Top 0.15: v28.48,25.87 26.89,25.87 U1.P$D23 | v40.39,23.79 42.74,23.79 43.44,23.1 43.44,20.68 43.99,20.12 C11.1
  Bottom 0.15: v28.48,25.87 30.76,25.87 32.84,23.79 v40.39,23.79
N$32  (via drill 0.15)
  Top 0.15: v19.62,23.45 19.62,22.34 21,20.95 21.49,20.95 21.56,21.02 22.11,21.02 U1.P$AC5 | v24.19,28.36 29.1,28.36 31.46,30.72 32.36,30.72 32.63,30.99 33.05,30.99 33.47,30.58 33.47,30.09 33.88,29.68 39.42,29.68 v39.7,29.96 | v43.78,22.89 43.78,22.48 43.92,22.34 C20.1
  Bottom 0.15: v19.62,23.45 21.69,25.52 21.69,25.87 v24.19,28.36 | v39.7,29.96 42.12,29.96 42.67,29.4 42.67,28.85 42.19,28.36 42.19,24.49 v43.78,22.89
N$33  (via drill 0.15)
  Top 0.15: 21.07,21.85 21.35,21.85 U1.P$Y2 | 21.07,21.85 20.93,21.99 U1.P$W1 | v21.07,21.3 21.07,21.85 | v9.58,8.77 v13.25,12.44 | v6.53,8.77 6.11,8.35 C6.1
  Bottom 0.15: v21.07,21.3 21.07,20.26 v13.25,12.44 | v6.53,8.77 v9.58,8.77
N$34  (via drill 0.15)
  Top 0.15: v20.24,26.49 20.86,26.49 U1.P$B1 | v16.99,23.24 16.99,21.44 16.09,20.54 v16.09,11.95 | v15.39,11.26 15.39,8.97 14.35,7.94 9.71,7.94 7.85,6.07 7.85,5.93 6.53,4.61 4.73,4.61 3.34,3.23 2.51,3.23 2.03,3.71 C14.1
  Bottom 0.15: v16.99,23.24 v20.24,26.49 | v15.39,11.26 v16.09,11.95
N$36  (via drill 0.15)
  Top 0.15: v27.23,26.22 26.4,27.05 U1.P$A22 | v28.96,23.93 28.96,19.36 31.8,16.52 31.8,16.31 C12.1
  Bottom 0.15: v27.23,26.22 27.23,25.66 v28.96,23.93
N$39  (via drill 0.15)
  Top 0.15: v25.57,19.71 25.23,19.71 24.39,20.54 U1.P$AD14 | v27.72,14.58 v26.82,14.58 | v32.98,14.51 34.5,14.51 34.78,14.79 v39.9,14.79 | v42.26,12.44 43.85,12.44 C7.1
  Bottom 0.15: v25.57,19.71 25.99,19.29 25.99,15.41 v26.82,14.58 | v27.72,14.58 32.91,14.58 v32.98,14.51 | v42.26,12.44 v39.9,14.79
N$43  (via drill 0.15)
  Top 0.15: v19.2,11.74 19.2,10.64 L3.1 | v18.44,12.51 17.54,12.51 16.71,13.34 16.71,19.29 18.23,20.82 L2.2
  Bottom 0.15: v18.44,12.51 v19.2,11.74
N$44  (via drill 0.15)
  Top 0.15: 33.78,6.38 34.5,7.11 35.33,7.11 C15.1 35.4,7.11 35.89,6.62 37.34,6.62 41.77,11.05 41.77,13.96 44.06,16.25 44.06,18.18 C10.1 | 33.78,6.38 33.26,5.86 C16.1 | v21.14,27.67 22.11,26.7 22.11,26.56 U1.P$B5 | v17.95,24.62 17.95,22.89 21.83,19.02 22.52,19.02 22.66,18.88 22.66,12.99 | 22.66,12.99 20.31,10.64 L3.2 | v27.23,25.25 27.37,25.39 27.37,25.52 U1.P$E24 | v25.71,12.09 24.33,12.09 23.42,12.99 22.66,12.99 | 33.78,6.38 32.91,7.24 32.91,7.52 31.53,8.91 29.1,8.91 v27.58,10.43
  Bottom 0.15: v21.14,27.67 21,27.67 v17.95,24.62 | v27.23,25.25 27.23,17.77 26.33,16.87 26.33,15.48 27.16,14.65 27.16,13.54 25.81,12.19 | v25.71,12.09 25.81,12.19 | 25.81,12.19 v27.58,10.43
N$45  (via drill 0.15)
  Top 0.15: v30.7,24.49 27.79,27.39 25.71,27.39 25.43,27.12 U1.P$A18 | v34.09,21.09 34.09,17.98 35.2,16.87 C13.1
  Bottom 0.15: v34.09,21.09 v30.7,24.49
N$46  (via drill 0.15)
  Top 0.15: v18.02,5.3 17.19,6.14 C2-EP-DR.1 | v23.36,12.09 v21.21,9.94 | v24.88,13.13 30.76,13.13 v31.39,13.75 | v34.85,14.45 36.51,14.45 37.41,13.54 D2.1 37.48,13.48 v38.04,12.92 | v39.07,11.88 39.07,9.81 D4.2
  Bottom 0.15: v18.02,5.3 18.51,5.3 21.21,8.01 v21.21,9.94 | v23.36,12.09 24.46,12.09 24.88,12.51 v24.88,13.13 | v31.39,13.75 34.16,13.75 v34.85,14.45 | v38.04,12.92 v39.07,11.88
N$47  (via drill 0.15)
  Top 0.15: v21.07,25.32 21.35,25.32 U1.P$F2 | v34.78,24.42 35.27,23.93 C18.1 35.27,23.86 35.27,23.17 33.88,21.78 32.5,21.78 v31.8,21.09 | v27.16,15.62 25.99,14.45 X2.1
  Bottom 0.15: v21.07,25.32 21.07,26.36 25.78,31.06 30.63,31.06 31.18,30.51 32.29,30.51 33.88,28.92 33.88,28.43 33.19,27.74 33.19,26.01 v34.78,24.42 | v27.16,15.62 27.16,16.45 v31.8,21.09
N$48  (via drill 0.15)
  Top 0.15: v21.42,19.85 21.42,20.54 U1.P$AD2 | v24.88,16.31 26.89,16.31 27.72,15.48 v27.72,14.93 | v40.74,25.04 41.36,25.04 41.84,25.52 C21.1
  Bottom 0.15: v21.42,19.85 24.88,16.38 v24.88,16.31 | v27.72,14.93 29.24,14.93 31.53,17.21 38.45,17.21 40.74,19.5 v40.74,25.04
N$49  (via drill 0.15)
  Top 0.15: v20.52,22.48 20.52,25.18 21.14,25.8 21.35,25.8 U1.P$D2 | v24.26,18.74 25.57,18.74 28.41,15.9 | 28.41,15.9 28.41,14.45 X2.2 | v34.43,19.98 35.75,19.98 C17.1 | v28.48,15.9 28.41,15.9
  Bottom 0.15: v24.26,18.74 v20.52,22.48 | v34.43,19.98 32.57,19.98 v28.48,15.9
N$50  (via drill 0.15)
  Top 0.15: v20.93,27.05 21.21,26.77 21.21,26.36 20.93,26.08 U1.P$C1 | v44.34,24.14 44.34,24 44.06,23.72 43.23,23.72 42.81,24.14 40.32,24.14 40.04,23.86 40.04,23.72 40.67,23.1 41.57,23.1 C5.1
  Bottom 0.15: v20.93,27.05 26.61,32.73 29.52,32.73 30.9,34.11 38.38,34.11 44.34,28.16 v44.34,24.14
N$52
  Top 0.15: R_TYPE_SEL.2 33.74,7.17 33.88,7.31 33.95,7.31 34.16,7.52 34.16,9.53 SJ1.2 34.23,9.6 34.71,10.08 R1_EP_DR.1
N$57  (via drill 0.15)
  Top 0.15: v15.81,2.05 15.81,1.57 EPD_C2.1 | v13.11,7.59 v13.11,5.51 | v11.24,21.44 10.96,21.72 10.68,21.72 J1.4
  Bottom 0.15: v15.81,2.05 15.81,2.81 v13.11,5.51 | v13.11,7.59 13.11,10.91 10.68,13.34 10.68,20.88 v11.24,21.44
N$58  (via drill 0.15)
  Top 0.15: v18.44,5.65 EPD_C1.1 | v15.74,9.25 15.74,15.14 11.24,19.64 11.24,20.95 10.96,21.23 10.68,21.23 J1.5
  Bottom 0.15: v18.44,5.65 18.44,6.55 v15.74,9.25
N$59  (via drill 0.15)
  Top 0.15: v23.49,28.36 21,28.36 20.66,28.71 20.66,29.12 J4.A9_B4 | v25.09,29.96 25.36,29.68 25.36,29.19 J4.A4_B9
  Bottom 0.15: v25.09,29.96 v23.49,28.36
N$60  (via drill 0.15)
  Top 0.15: v24.39,5.37 24.39,5.72 C27.2 | v19.96,4.06 v20.66,4.06 | v4.45,26.7 4.73,26.98 5.01,26.98 U3.3 U3.2
  Bottom 0.15: v24.39,5.37 22.39,5.37 21.07,4.06 v20.66,4.06 | v19.96,4.06 15.88,4.06 10.13,9.81 10.13,11.54 7.36,14.31 7.36,24.55 5.21,26.7 v4.45,26.7
N$62
  Top 0.15: U1.P$B3 21.62,26.77 21,27.39 19.06,27.39 17.33,25.66 17.33,20.88 L2.1
N$65  (via drill 0.15)
  Top 0.15: v9.37,26.84 7.29,28.92 3,28.92 R2_USB.1 | v21,29.96 21.21,29.75 21.21,29.19 J4.B5
  Bottom 0.15: v9.37,26.84 17.89,26.84 v21,29.96
N$66
  Top 0.15: R1_USB.2 17.47,28.99 17.61,29.12 17.68,29.12 17.89,29.33 17.89,30.58 18.37,31.06 22.87,31.06 24.26,29.68 24.26,29.19 J4.A5
N$68  (via drill 0.15)
  Top 0.15: v17.26,5.65 17.75,5.17 17.75,3.71 18.16,3.3 18.16,1.63 EPD_C5.1 | v11.24,15.62 10.75,15.62 10.68,15.69 J1.16 10.68,15.76 10.68,16.18 J1.15
  Bottom 0.15: v17.26,5.65 17.26,7.17 11.03,13.41 11.03,15.41 v11.24,15.62
N$70  (via drill 0.15)
  Top 0.15: v24.74,5.44 24.74,4.68 26.75,2.67 26.75,1.63 EPD_C6.1 | v9.71,9.74 9.37,10.08 9.37,13.75 10.34,14.72 10.61,14.72 J1.18
  Bottom 0.15: v24.74,5.44 24.26,5.93 21.07,5.93 20.31,5.17 20.31,3.99 20.03,3.71 15.74,3.71 v9.71,9.74
N$71  (via drill 0.15)
  Top 0.15: v29.59,5.58 29.17,5.17 29.17,4.2 EPD_C7.1 | v29.59,7.66 27.58,9.67 v23.91,9.67 | v21.07,12.51 19.2,14.38 v19.2,18.81 | v11.38,14.38 10.75,14.38 10.68,14.31 J1.19
  Bottom 0.15: v29.59,7.66 v29.59,5.58 | v21.07,12.51 v23.91,9.67 | v19.2,18.81 18.44,18.81 14.01,14.38 v11.38,14.38
N$72  (via drill 0.15)
  Top 0.15: v25.36,5.86 25.85,5.37 26.89,5.37 29.03,3.23 29.03,1.63 EPD_C8.1 | v21.56,8.91 20.72,8.91 20.24,9.39 v17.12,9.39 | v11.38,13.48 11.24,13.48 11.03,13.68 10.68,13.68 J1.20
  Bottom 0.15: v25.36,5.86 25.36,7.17 25.85,7.66 25.85,7.8 25.16,8.49 21.97,8.49 v21.56,8.91 | v17.12,9.39 16.43,9.39 14.08,11.74 13.11,11.74 v11.38,13.48
N$73  (via drill 0.15)
  Top 0.15: v43.64,15.41 44.13,15.41 EPD_C9.1 | v36.72,15.41 v40.53,15.41 | v17.33,10.29 v18.44,10.29 | v12.14,13.13 10.75,13.13 10.68,13.2 J1.21
  Bottom 0.15: v40.53,15.41 v43.64,15.41 | v36.72,15.41 30.9,9.6 25.99,9.6 25.23,8.84 22.73,8.84 21.28,10.29 v18.44,10.29 | v17.33,10.29 15.95,10.29 14.15,12.09 13.18,12.09 v12.14,13.13
N$74  (via drill 0.15)
  Top 0.15: v12.14,33.14 15.95,33.14 EPD_C10.1 | v9.71,13.34 10.27,12.78 10.61,12.78 J1.22
  Bottom 0.15: v12.14,33.14 10.13,33.14 7.29,30.3 7.29,26.42 7.5,26.22 7.5,25.25 8.81,23.93 8.81,14.24 v9.71,13.34
N$75  (via drill 0.15)
  Top 0.15: v8.88,32.38 9.58,31.69 11.38,31.69 11.86,32.17 14.15,32.17 15.25,31.06 15.81,31.06 EPD_C11.1 | v9.71,12.85 10.27,12.3 10.61,12.3 J1.23
  Bottom 0.15: v8.88,32.38 5.77,32.38 3.21,29.82 3.21,29.12 8.47,23.86 8.47,14.1 v9.71,12.85
N$76  (via drill 0.15)
  Top 0.15: v12.28,31.13 12.76,31.62 EPD_C12.1 | v10.06,20.47 v10.06,24.14 | v10.06,12.02 10.34,11.74 10.61,11.74 J1.24
  Bottom 0.15: v12.28,31.13 12.28,30.16 9.02,26.91 9.02,25.18 v10.06,24.14 | v10.06,12.02 v10.06,20.47
N$77
  pour Bottom (rank 2): 31.39,2.03 31.42,2.04 36.57,2.04 36.6,2.03 36.62,2.01 36.63,1.98 36.63,0.23 38.81,0.23 40.9,0.23 40.9,5.29 40.91,5.32 40.93,5.34 40.96,5.35 45.76,5.35 45.76,26.67 45.76,26.67 45.76,26.68 45.76,26.69 45.76,26.7 45.79,27.53 45.72,28.36 45.55,29.19 45.29,29.99 44.95,30.75 44.52,31.48 44.02,32.15 43.44,32.76 42.8,33.3 42.1,33.76 41.35,34.15 40.57,34.45 39.75,34.66 38.92,34.77 7.21,34.77 6.42,34.73 5.65,34.6 4.9,34.38 4.18,34.08 3.49,33.7 2.86,33.25 2.27,32.73 1.75,32.15 1.3,31.51 0.92,30.82 0.62,30.1 0.4,29.35 0.27,28.58 0.23,27.79 0.23,24.63 7.17,24.63 7.2,24.62 7.22,24.59 7.23,24.57 7.23,10.41 7.22,10.38 7.2,10.36 7.17,10.35 0.23,10.35 0.23,7.12 0.28,6.29 0.43,5.47 0.68,4.68 1.02,3.92 1.45,3.21 1.96,2.55 2.55,1.96 3.21,1.45 3.92,1.02 4.68,0.68 5.47,0.43 6.29,0.28 7.12,0.23 9.37,0.23 9.37,1.96 9.38,1.99 9.4,2.01 9.43,2.03 14.56,2.03 14.59,2.01 14.61,1.99 14.62,1.96 14.62,0.24 20.37,0.24 20.37,1.97 20.38,2 20.4,2.02 20.43,2.03 25.59,2.03 25.61,2.02 25.64,2 25.65,1.97 25.65,0.24 31.36,0.24 31.36,1.98 31.37,2.01
N$78  (via drill 0.15)
  Top 0.15: v3.55,29.75 2.58,29.75 C34.2 | v9.16,24.14 v7.15,26.15 | v12.76,21.16 12.97,21.37 IC2.C2
  Bottom 0.15: v7.15,26.15 v3.55,29.75 | v9.16,24.14 12.14,21.16 v12.76,21.16
N$81
  Top 0.15: C32.2 2.86,30.99 5.35,30.99 7.08,29.26 7.36,29.26 12.97,23.65 12.97,22.48 IC2.A2
N$84
  Top 0.15: 20.66,5.37 20.93,5.37 21.07,5.24 21.83,5.24 R7.2 | 20.66,5.37 19.82,5.37 R5.2 | 20.66,5.37 20.66,6.07 19.89,6.83 19.89,7.87 R8.2
P0.13/1.5D  (via drill 0.15)
  Top 0.15: 25.5,8.01 26.47,8.01 27.2,7.28 29.38,7.28 32.57,4.09 32.57,3.85 SW_UP.2 | 25.5,8.01 C30.2 | v20.31,6 19.82,6 R5.1 | 25.5,8.01 v25.5,7.73
  Bottom 0.15: v20.31,6 22.04,7.73 v25.5,7.73
P0.14/1.5D  (via drill 0.15)
  Top 0.15: v41.5,17.63 41.5,18.53 C31.2 | v22.18,3.23 21.62,3.78 SW_ENT.2 21.56,3.85 v21,4.4 | v21.14,5.58 21.14,7.31 20.03,8.42 19.89,8.42 R8.1
  Bottom 0.15: v41.5,17.63 41.5,16.8 35.96,11.26 35.96,6.14 33.05,3.23 v22.18,3.23 | v21.14,5.58 21.14,4.54 v21,4.4
P1.01/1.6C
  Top 0.15: R_PWR_EPD.1 12.48,7.24 12.35,7.11 12.28,7.11 11.31,6.14 11.31,6.07 7.78,2.54 6.39,2.54 5.77,1.91 Q1.1
P1.02/1.6C  (via drill 0.15)
  Top 0.15: v34.71,5.72 36.17,5.72 36.37,5.51 36.37,5.37 C29.2 | v25.57,5.24 25.36,5.24 24.46,6.14 22.25,6.14 21.9,5.79 R7.1 21.9,5.86 v21.49,6.27 | v15.46,4.89 11.38,4.89 10.61,4.13 10.61,3.85 SW_DN.2
  Bottom 0.15: v34.71,5.72 30.14,5.72 29.66,5.24 v25.57,5.24 | v15.46,4.89 19.62,4.89 21,6.27 v21.49,6.27
RESE
  Top 0.15: R1_EP_DR.2 36.37,9.6 36.51,9.74 36.58,9.74 36.72,9.88 36.72,10.29 34.99,12.02 32.57,12.02 Q3.2
SCL/1.4C
  Top 0.15: IC2.C1 12.48,21.44 12.35,21.44 11.24,22.55 11.24,24.21 7.91,27.53 7.08,27.53 U3.7
SDA/1.4C  (via drill 0.15)
  Top 0.15: v12.76,22.2 12.97,21.99 IC2.B2 | v7.64,27.88 7.22,27.88 7.08,28.02 U3.8
  Bottom 0.15: v12.76,22.2 12.35,21.78 12,21.78 7.85,25.94 7.85,27.67 v7.64,27.88
SEC
  pour Bottom: 31.56,1.86 31.58,1.88 36.42,1.88 36.44,1.86 36.46,1.84 36.48,1.82 36.48,0.08 39,0.08 41.06,0.08 41.06,5.12 41.07,5.15 41.1,5.17 41.12,5.18 45.92,5.18 45.92,26.72 45.92,26.72 45.92,26.73 45.92,26.75 45.92,26.75 45.95,27.59 45.87,28.43 45.71,29.27 45.45,30.08 45.1,30.85 44.67,31.59 44.15,32.27 43.57,32.88 42.92,33.43 42.21,33.9 41.45,34.29 40.66,34.59 39.84,34.81 38.99,34.92 7,34.92 6.22,34.88 5.46,34.75 4.71,34.54 4,34.24 3.32,33.86 2.68,33.41 2.1,32.9 1.59,32.32 1.14,31.68 0.76,31 0.46,30.29 0.25,29.54 0.12,28.78 0.08,28 0.08,24.48 7.02,24.48 7.04,24.46 7.06,24.44 7.08,24.42 7.08,10.58 7.06,10.56 7.04,10.54 7.02,10.52 0.08,10.52 0.08,7 0.12,6.22 0.25,5.46 0.46,4.71 0.76,4 1.14,3.32 1.59,2.68 2.1,2.1 2.68,1.59 3.32,1.14 4,0.76 4.71,0.46 5.46,0.25 6.22,0.12 7,0.08 9.52,0.08 9.52,1.82 9.54,1.84 9.56,1.86 9.58,1.88 14.42,1.88 14.44,1.86 14.46,1.84 14.48,1.82 14.48,0.08 20.52,0.08 20.52,1.82 20.54,1.84 20.56,1.86 20.58,1.88 25.42,1.88 25.44,1.86 25.46,1.84 25.48,1.82 25.48,0.08 31.52,0.08 31.52,1.82 31.54,1.84
SWDCLK
  Top 0.15: U1.P$AA24 27.44,21.51 27.99,20.95 27.99,18.05 TP_SWDCLK.TP
SWO
  Top 0.15: TP_SWO.TP 6.67,6.48 7.85,6.48 10.48,9.11 13.8,9.11 TP_VREG.TP
VBAT/2.5C  (via drill 0.35)
  Top 0.152: C37.2 15.03,27.71 v14.54,27.23 | v14.15,28.02 13.98,28.02 13.63,27.66 IC1.C2
  Bottom 0.152: v14.54,27.23 14.54,27.63 v14.15,28.02
VBUS/1.5D
  Top 0.15: 25.64,6.34 26.19,5.79 29.24,5.79 29.73,6.27 29.73,6.41 29.66,6.48 C42.2
  Top 0.3: 25.64,6.34 C43.1
VBUS/2.6D  (via drill 0.35)
  Top 0.152: IC1.A2 11.82,29.99 v11.66,30.15 | v9.39,28.13 10.51,27.01 10.51,26.68 v10.76,26.43 | v12.82,26.4 12.27,25.84 C38.2
  Bottom 0.152: v11.66,30.15 11.41,30.15 v9.39,28.13 | v10.76,26.43 12.8,26.43 v12.82,26.4
VREG
  Top 0.152: C39.1 IC1.B2